# EAGLE board CurrentRestrictionBoard_V1_0_TO_PRINT (EAGLE 6.1)
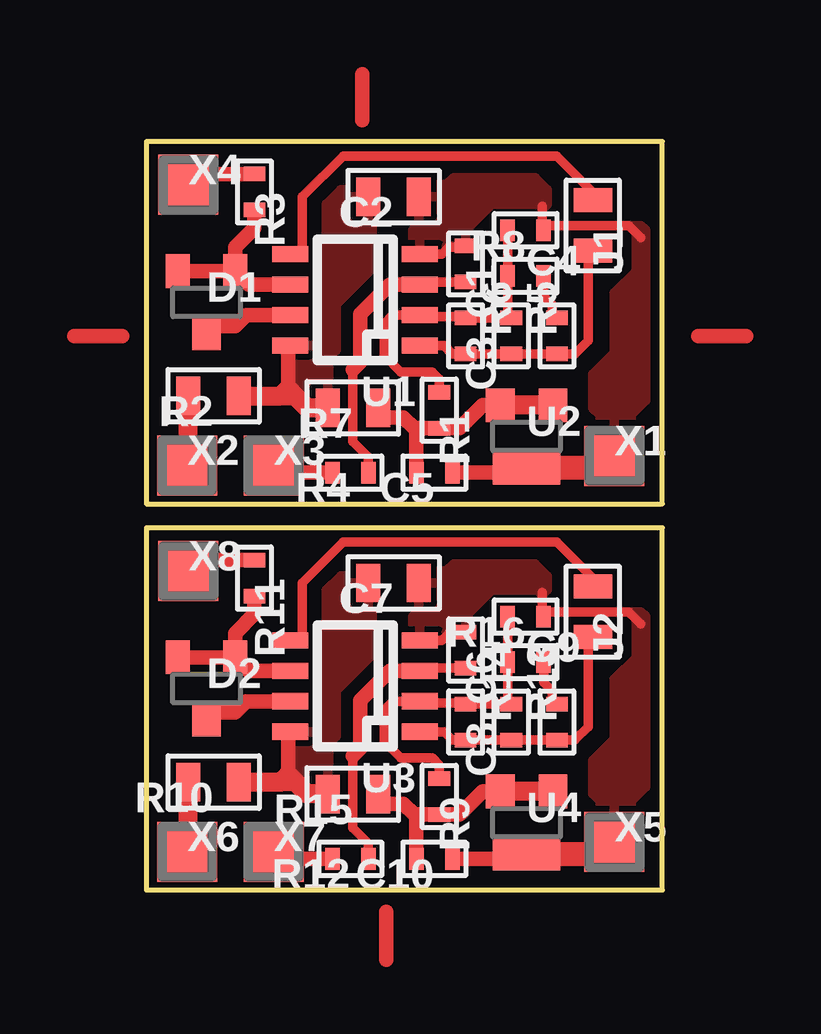
[diagram p0: board, top side]

Size 21.5 x 31.2 mm. Coordinates in mm from the lower left corner, seen from the top.
Outline: 0,16.1 21.5,16.1 21.5,31.2 0,31.2 0,16.1
Outline: 0,0 21.5,0 21.5,15.1 0,15.1 0,0
Copper layers (1*16): Top 0.035mm / dielectric 1.5mm / Bottom 0.035mm
Design rules: minimum track width 0.4mm, minimum drill 0.6mm, track to track 0.35mm, track to pad 0.35mm, pad to pad 0.35mm, via to via 0.35mm, smd to smd 0mil, copper to edge 0.2mm, drill to drill 8mil, minimum pad ring 10mil, minimum via ring 8mil, stop-mask expansion 4mil, vias tented up to drill 0mil, thermal gap 10mil

## Footprints (pad centres in the part's own frame; a part is rotated, then mirrored left to right if it is on the bottom)
RSMD_0603 = smd 0.6 x 0.9: PAD_0 -0.75,0; PAD_1 0.75,0
RSMD_0805 = smd 1 x 1.6: PAD_0 -1.05,0; PAD_1 1.05,0
SOT23_SMALL_PADS = smd 1 x 1.4: 1 1.2,1.3; 2 -1.2,1.3 | smd 1.2 x 1.4: 3 0,-1.3
SOIC8 = smd 1.5 x 0.68: 1 -2.699,1.905; 2 -2.699,0.635; 3 -2.699,-0.635; 4 -2.699,-1.905; 5 2.699,-1.905; 6 2.699,-0.635; 7 2.699,0.635; 8 2.699,1.905
SOT23 = smd 1.2 x 1.4: 1 1.1,1.3; 2 -1.1,1.3 | smd 2.8 x 1.4: 3 0,-1.3
PIN1X1_2.5X2.5MM = smd 2.5 x 2.5: 1 0,0

## Placement (x,y rotation side)
C1  *  [RSMD_0603]  13.3,26.1 270 top
C2  0.47uF x 16V  [RSMD_0805]  10.3,28.9 180 top
C3  1n0 16V  [RSMD_0603]  13.3,23.1 270 top
C4  *  [RSMD_0603]  15.8,25.6 0 top
C5  0.1uF x 16V  [RSMD_0603]  12,17.4 180 top
C6  *  [RSMD_0603]  13.3,10 270 top
C7  0.47uF x 16V  [RSMD_0805]  10.3,12.8 180 top
C8  1n0 16V  [RSMD_0603]  13.3,7 270 top
C9  *  [RSMD_0603]  15.8,9.5 0 top
C10  0.1uF x 16V  [RSMD_0603]  12,1.3 180 top
D1  BAT54A  [SOT23_SMALL_PADS]  2.5,24.5 0 top
D2  BAT54A  [SOT23_SMALL_PADS]  2.5,8.4 0 top
J1  0  [RSMD_0805]  18.6,27.7 270 top
J2  0  [RSMD_0805]  18.6,11.6 270 top
R1  22K  [RSMD_0603]  12.2,20 270 top
R2  10R  [RSMD_0805]  2.8,20.6 180 top
R3  5K1  [RSMD_0603]  4.5,29.1 270 top
R4  *  [RSMD_0603]  8.5,17.4 180 top
R5  *  [RSMD_0603]  17.1,23.1 90 top
R6  680K  [RSMD_0603]  15.2,23.1 90 top
R7  5K1  [RSMD_0805]  8.6,20.1 180 top
R8  10K  [RSMD_0603]  15.8,27.5 180 top
R9  22K  [RSMD_0603]  12.2,3.9 270 top
R10  10R  [RSMD_0805]  2.8,4.5 180 top
R11  5K1  [RSMD_0603]  4.5,13 270 top
R12  *  [RSMD_0603]  8.5,1.3 180 top
R13  *  [RSMD_0603]  17.1,7 90 top
R14  680K  [RSMD_0603]  15.2,7 90 top
R15  5K1  [RSMD_0805]  8.6,4 180 top
R16  10K  [RSMD_0603]  15.8,11.4 180 top
U1  LM358  [SOIC8]  8.7,24.6 180 top
U2  TL431  [SOT23]  15.84,18.91 0 top
U3  LM358  [SOIC8]  8.7,8.5 180 top
U4  TL431  [SOT23]  15.84,2.81 0 top
X1  GND  [PIN1X1_2.5X2.5MM]  19.5,18.1 0 top
X2  +12V  [PIN1X1_2.5X2.5MM]  1.7,17.7 0 top
X3  CS_IN  [PIN1X1_2.5X2.5MM]  5.3,17.7 0 top
X4  VReg_OUT  [PIN1X1_2.5X2.5MM]  1.75,29.4 0 top
X5  GND  [PIN1X1_2.5X2.5MM]  19.5,2 0 top
X6  +12V  [PIN1X1_2.5X2.5MM]  1.7,1.6 0 top
X7  CS_IN  [PIN1X1_2.5X2.5MM]  5.3,1.6 0 top
X8  VReg_OUT  [PIN1X1_2.5X2.5MM]  1.75,13.3 0 top

## Library data of the parts
C1-C10 D1 D2 J1 J2 R1-R16 U1-U4 X1-X8 = __MyCommonLib1

## Nets
+12V: C2.PAD_1 R2.PAD_0 R7.PAD_1 U1.8
+12V1: C7.PAD_1 R10.PAD_0 R15.PAD_1 U3.8
GND: C1.PAD_0 C2.PAD_0 C5.PAD_0 R8.PAD_0 U1.4 U2.3 X1.1
GND1: C6.PAD_0 C7.PAD_0 C10.PAD_0 R16.PAD_0 U3.4 U4.3 X5.1
N$1: R2.PAD_1 X2.1
N$2: R4.PAD_1 X3.1
N$3: C1.PAD_1 R4.PAD_0 U1.3
N$4: C3.PAD_0 C4.PAD_0 R1.PAD_0 R6.PAD_1 R8.PAD_1 U1.2
N$5: C3.PAD_1 J1.PAD_1 R5.PAD_0 R6.PAD_0 U1.1
N$6: C4.PAD_1 R5.PAD_1
N$7: D1.1 D1.2 R3.PAD_1 U1.6
N$8: D1.3 U1.7
N$9: R3.PAD_0 X4.1
N$10: C5.PAD_1 R1.PAD_1 R7.PAD_0 U2.1 U2.2
N$11: J1.PAD_0 U1.5
N$12: R10.PAD_1 X6.1
N$13: R12.PAD_1 X7.1
N$14: C6.PAD_1 R12.PAD_0 U3.3
N$15: C8.PAD_1 J2.PAD_1 R13.PAD_0 R14.PAD_0 U3.1
N$16: C9.PAD_1 R13.PAD_1
N$17: D2.1 D2.2 R11.PAD_1 U3.6
N$18: D2.3 U3.7
N$19: R11.PAD_0 X8.1
N$20: C10.PAD_1 R9.PAD_1 R15.PAD_0 U4.1 U4.2
N$21: C8.PAD_0 C9.PAD_0 R9.PAD_0 R14.PAD_1 R16.PAD_1 U3.2
N$22: J2.PAD_0 U3.5

## Tracks (layer width: path | path; a pad name or v marks a point on that pad's centre or on a via)
+12V
  Top 0.6: U1.8 5.9,22.59 5.9,20.9
  Top 0.8: R2.PAD_0 5.6,20.6 | 5.6,20.6 5.9,20.9 6.2,20.6 | 6.2,20.6 5.6,20.6 | R7.PAD_1 6.7,20.1 6.2,20.6
  pour Top: 5.8,20.9 6.7,20 7.6,20 7.6,22.2 7.9,22.5 7.9,24.4 9.4,25.9 9.4,29.2 8.1,29.2 7.5,28.6 7.5,23.1 7.1,22.7 5.8,22.7
+12V1
  Top 0.6: U3.8 5.9,6.49 5.9,4.8
  Top 0.8: R10.PAD_0 5.6,4.5 | 5.6,4.5 5.9,4.8 6.2,4.5 | 6.2,4.5 5.6,4.5 | R15.PAD_1 6.7,4 6.2,4.5
  pour Top: 5.8,4.8 6.7,3.9 7.6,3.9 7.6,6.1 7.9,6.4 7.9,8.3 9.4,9.8 9.4,13.1 8.1,13.1 7.5,12.5 7.5,7 7.1,6.6 5.8,6.6
GND
  Top 0.4: U1.4 12.3,26.51 12.6,26.8 13.25,26.8 C1.PAD_0 | 20.6,27.2 20.1,27.7 16.75,27.7 R8.PAD_0 16.5,27.55 16.5,28.5
  Top 0.6: C5.PAD_0 15.63,17.4 U2.3
  Top 1: U2.3 19.01,17.61 X1.1
  pour Top: 11.1,26.4 12.2,26.4 12.6,26.8 13.4,26.8 13.4,27.6 14.4,28.6 16.3,28.6 16.5,28.4 16.7,28.6 16.7,29.2 16.2,29.7 12.8,29.7 12.5,29.4 11.3,29.4 11.3,27.7 11.1,27.5
  pour Top: 18.6,21.5 18.6,20.1 18.9,19.8 18.9,17.6 20.2,17.6 20.2,19.8 20.8,20.4 20.8,27.5 20.6,27.7 20.1,27.7 20.4,27.4 20.4,25.8 19.5,24.9 19.5,22.4
GND1
  Top 0.4: U3.4 12.3,10.41 12.6,10.7 13.25,10.7 C6.PAD_0 | 20.6,11.1 20.1,11.6 16.75,11.6 R16.PAD_0 16.5,11.45 16.5,12.4
  Top 0.6: C10.PAD_0 15.63,1.3 U4.3
  Top 1: U4.3 19.01,1.51 X5.1
  pour Top: 11.1,10.3 12.2,10.3 12.6,10.7 13.4,10.7 13.4,11.5 14.4,12.5 16.3,12.5 16.5,12.3 16.7,12.5 16.7,13.1 16.2,13.6 12.8,13.6 12.5,13.3 11.3,13.3 11.3,11.6 11.1,11.4
  pour Top: 18.6,5.4 18.6,4 18.9,3.7 18.9,1.5 20.2,1.5 20.2,3.7 20.8,4.3 20.8,11.4 20.6,11.6 20.1,11.6 20.4,11.3 20.4,9.7 19.5,8.8 19.5,6.3
N$1
  Top 0.8: X2.1 1.75,17.75 R2.PAD_1
N$2
  Top 0.6: X3.1 5.6,17.4 R4.PAD_1
N$3
  Top 0.4: U1.3 11.51,25.35 C1.PAD_1 | R4.PAD_0 9.25,18.05 8.6,18.7 8.6,21.7
  Top 0.6: U1.3 10.13,25.23 8.9,24 8.9,22 8.6,21.7
N$4
  Top 0.4: 11.36,24 U1.2 | R8.PAD_1 C4.PAD_0 15.05,23.85 R6.PAD_1 C3.PAD_0 13.25,23.9 11.46,23.9 U1.2 | U1.2 10.27,23.97 9.9,23.6 9.9,22.3 10.6,21.6 11.9,21.6 12.2,21.3 R1.PAD_0
N$5
  Top 0.4: U1.1 12.4,22.7 12.75,22.35 C3.PAD_1 R6.PAD_0 R5.PAD_0 17.85,22.35 18.4,22.9 18.4,26.45 J1.PAD_1
N$6
  Top 0.4: C4.PAD_1 16.55,24.75 16.9,24.4 16.9,24.05 R5.PAD_1
N$7
  Top 0.6: D1.2 D1.1 | U1.6 4.26,25.23 D1.1 | D1.1 3.7,26.8 4.5,27.6 R3.PAD_1
N$8
  Top 0.6: U1.7 4.17,23.97 3.7,23.5 2.8,23.5 D1.3
N$9
  Top 0.6: R3.PAD_0 2.2,29.85 X4.1
N$10
  Top 0.6: R7.PAD_0 10.05,19.7 10.7,19.7 11.15,19.25 11.5,19.25 | 11.5,19.25 R1.PAD_1 13.05,19.25 14.01,20.21 U2.2 | C5.PAD_1 11.25,19 11.5,19.25
  Top 0.8: U2.1 U2.2
N$11
  Top 0.4: J1.PAD_0 18.6,29.1 17.1,30.6 8.2,30.6 6.5,28.9 6.5,26.51 U1.5
N$12
  Top 0.8: X6.1 1.75,1.65 R10.PAD_1
N$13
  Top 0.6: X7.1 5.6,1.3 R12.PAD_1
N$14
  Top 0.4: U3.3 11.51,9.25 C6.PAD_1 | R12.PAD_0 9.25,1.95 8.6,2.6 8.6,5.6
  Top 0.6: U3.3 10.13,9.14 8.9,7.9 8.9,5.9 8.6,5.6
N$15
  Top 0.4: U3.1 12.4,6.6 12.75,6.25 C8.PAD_1 R14.PAD_0 R13.PAD_0 17.85,6.25 18.4,6.8 18.4,10.35 J2.PAD_1
N$16
  Top 0.4: C9.PAD_1 16.55,8.65 16.9,8.3 16.9,7.95 R13.PAD_1
N$17
  Top 0.6: D2.2 D2.1 | U3.6 4.26,9.14 D2.1 | D2.1 3.7,10.7 4.5,11.5 R11.PAD_1
N$18
  Top 0.6: U3.7 4.17,7.87 3.7,7.4 2.8,7.4 D2.3
N$19
  Top 0.6: R11.PAD_0 2.2,13.75 X8.1
N$20
  Top 0.6: R15.PAD_0 10.05,3.6 10.7,3.6 11.15,3.15 11.5,3.15 | 11.5,3.15 R9.PAD_1 13.05,3.15 14.01,4.11 U4.2 | C10.PAD_1 11.25,2.9 11.5,3.15
  Top 0.8: U4.1 U4.2
N$21
  Top 0.4: 11.36,7.9 U3.2 | R16.PAD_1 C9.PAD_0 15.05,7.75 R14.PAD_1 C8.PAD_0 13.25,7.8 11.46,7.8 U3.2 | U3.2 10.27,7.87 9.9,7.5 9.9,6.2 10.6,5.5 11.9,5.5 12.2,5.2 R9.PAD_0
N$22
  Top 0.4: J2.PAD_0 18.6,13 17.1,14.5 8.2,14.5 6.5,12.8 6.5,10.41 U3.5
S$1
  Top 0.6: 9,34 9,32.1
S$2
  Top 0.6: 23,23.1 25,23.1
S$3
  Top 0.6: -1,23.1 -3,23.1
S$4
  Top 0.6: 10,-0.9 10,-2.9